# Altium PCB MainPCB.PcbDoc (part 2 of 3)
Units mil, origin at the board's own origin, x right, y up, seen from the top; angles counter-clockwise.
Board outline 2751.85 x 1031.01 mil, 4 copper layers (L1, L2, L3, L4), stack 61.583 mil thick; 64 components, 73 nets, 299 pads, 162 vias.
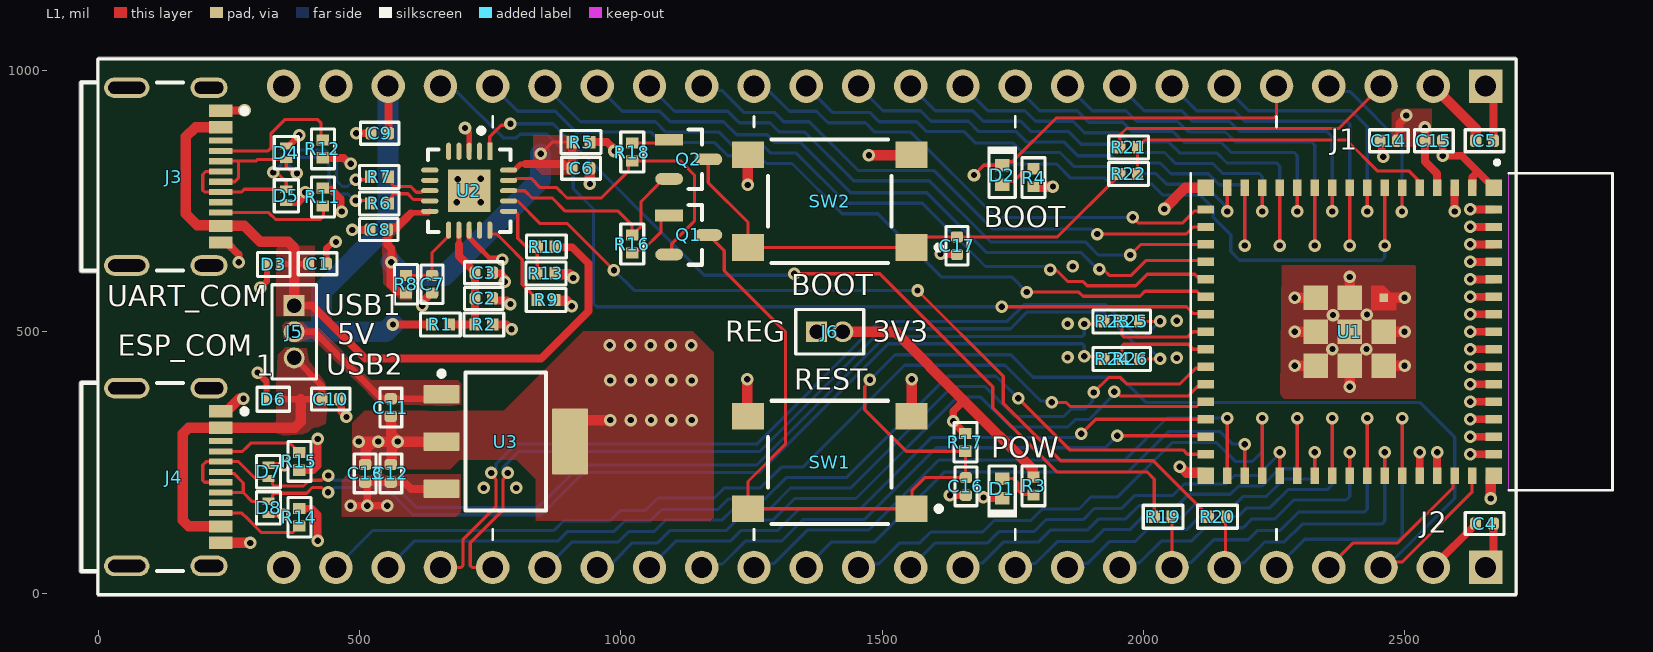
[diagram p0: L1 view]

## Part data (continued)
U3: "IC REG LINEAR 3.3V 1.5A SOT223-4", Case/Package=SOP, Dropout Voltage1-Max=550mV, Dropout Voltage1-Nom=340mV, Input Voltage Absolute-Max=20V, LCSC Part Number=C181262, Manufacturer="Texas Instruments", Min Input Voltage=3.8V, Operating Temperature, TJ-Max=125°C, Operating Temperature, TJ-Min=-40°C, Output Current1-Max=1.5A, Output Voltage1-Max=3.4V, Output Voltage1-Min=3.2V, Output Voltage1-Nom=3.3V, Package Body Material=Plastic, Package Shape=Rectangular, Package Style="SMALL OUTLINEMeter", Peak Reflow Temperature (Cel)=260°C, Supplier Part Number=296-24897-1-ND, Voltage Tolerance-Max=3%, Adjustability=FIXED, Category="Voltage Regulators - Linear", Channels=1, ComponentLink1Description=https://www.ti.com:443/lit/ds/symlink/tl1963a.pdf?src-supplier=IHS+Markit, ComponentLink1URL=https://www.ti.com:443/lit/ds/symlink/tl1963a.pdf?src-supplier=IHS+Markit, ComponentLink2Description=https://datasheet.ciiva.com/2046/-2046068.pdf?src-supplier=Digikey, ComponentLink2URL=https://datasheet.ciiva.com/2046/-2046068.pdf?src-supplier=Digikey, Height - Seated (Max)=1.8mm, JESD-30 Code=R-PDSO-G4, JESD-609 Code=e3, Length=6.5mm, Line Regulation-Max=0.01%, Load Regulation-Max=0.07%, Manufacturer Part Number=TL1963A-33DCYR, Max Supply Voltage=20V, Moisture Sensitivity Level=2, Number of Outputs=1, Packaging="Tape and Reel", Pins=4, Pricing="1=2.91, 10=2.614, 25=2.4712, 100=2.1417, 250=2.03188, 500=1.8232, 1000=1.53764 (USD)", Qualification Status="Not Qualified", Reach SVHC Compliant=Yes, Regulator Type="FIXED POSITIVE SINGLE OUTPUT LDO REGULATOR", RoHS=Yes, RoHS Compliant=Yes, Stock=4105, Supplier=Digikey, Surface Mount=Yes, Technology=BIPOLAR, Terminal Finish=Tin, Terminal Form="Gull Wing", Terminal Pitch=2.3mm, Terminal Position=DUAL, Width=3.5mm

## Via types
v1: diameter 24, hole 12, L1 to L4, tented both sides, 162 vias

## Nets (pads, with @x,y where several pads share a name; then routed paths per layer and width w, separated by ;. In a path a pad name is that pad's centre, name@x,y a point inside that pad or via, vN(x,y) a via of type N, cw(c..) or ccw(c..) an arc to the next point about the centre after c; other vN are vias at no path point)
+3V3: C4.2 C5.2 C14.2 C15.2 J1.2 J2.1 J6.2 R2.1 R3.2 R4.2 R5.1 R17.2 U1.3 | length 4585.8
  L1 w15: R2.1@755.01,514 782,514 v1(791,505) ; R5.1@941.01,863 974,863 986.28,850.72 986.28,847.72 v1(988,846) ; 1656.59,368.41 1636.17,347.98 1636.17,327.67 1658.32,305.52 R17.2@1659.5,305.52 ; C14.2@2486.89,865.55 2490.02,868.68 2490.02,898.59 2503,911.56 v1(2503,914) ; v1(2539,891) 2539,826 2561.98,803.02 2561.98,775.96 U1.3@2562.35,775.59 ; J2.1@2655,49 2669.93,63.93 C4.2@2669.93,133
  L1 w20: J6.2@1425,500 1525,500 1656.59,368.41 1788.19,236.81 1788.19,222.64 1788.82,222.01 R3.2@1790,222.01 ; R4.2@1790,777.99 v1(1827,778) ; J1.2@2555,970 2636.1,888.9 C5.2@2636.1,865.55
  L2 w15: v1(2503,914) 2505.44,914 2526.71,892.72 2537.28,892.72 v1(2539,891)
  L2 w20: 2489,778 2658.28,778 2670,766.28 2670,244 2629.28,203.28 2629.28,154.72 2655,129 J2.1@2655,49
  L2 w40: v1(791,505) 812,505 846,539 846,773 919,846 v1(988,846) 1115,719 1441.5,719 ; J6.2@1425,500 1441.5,516.5 1441.5,719 ; J1.2@2555,970 2555,907 v1(2539,891) 2524,876 2524,813 2489,778 v1(1827,778) 1768,719 1441.5,719
  other v1: 1636.17,328.83
+3V3_FTDI: C6.2 C8.2 R5.2 R8.1 U2.10 U2.20 | length 912.7
  L1 w6: v1(846.75,840.75) 869,863 R5.2@906.99,863
  L1 w10.01: 598,726.43 599.48,727.9 631.86,727.9 U2.10@634.59,730.63 ; U2.20@785.41,809.37 796.71,809.37 808.34,821 818,821
  L1 w15: R8.1@589,573.99 585.87,577.12 572.7,577.12 559.69,590.13 559.69,632.19 v1(560.73,633.24) 560.73,659.3 553.93,666.1 553.93,696.74 557.06,699.87 571.44,699.87 598,726.43 ; 818,821 829.81,821 890.17,821 893.85,817.31 903.94,817.31 907.07,814.18 C6.2@907.07,813 907.03,813.04 R5.2@906.99,863 R5.2@906.99,863
  L4 w40: v1(560.73,633.24) 561,632.97 561,632 585,608 663,608 846.75,791.75 v1(846.75,840.75)
+3V3_REG: C12.2 C13.2 J6.1 U3.3 | length 1330.5
  L1 w15: v1(483,167) v1(515,167) ; C13.2@511,212.07 585.93,212.07 598.55,199.45 U3.3@656.97,199.45 ; C13.2@511.87,212.07 515,208.94 v1(515,167) ; v1(553,167) v1(515,167)
  L2 w40: v1(483,167) v1(515,167) ; v1(553,167) 597.28,167 600.28,170 644.56,170 ; 1375,424 J6.1@1375,500
  L2 w60: 644.56,170 676.56,138 1089,138 1375,424
+5V: C9.2 C11.2 J1.22 J5.2 R1.1 U3.1 | length 1220.8
  L1 w12: J5.2@375,500 414,500 540.74,373.26 558.67,373.26 C11.2@560,371.93 648.35,371.93 U3.1@656.97,380.55
  L1 w15: J1.22@555,970 555.47,969.53 555.47,880.47 C9.2@555.93,880 ; v1(564,514) R1.1@637.99,514
  L4 w40: J5.2@375,500 427,500 ; J1.22@555,970 555,704.6 427,576.6 427,500 ; v1(564,514) 550,500 427,500
+5V_VBUS1: C1.2 D3.2 J3.A4B9 J3.B4A9 J5.1 R10.2 | length 1432.3
  L1 w12: D3.2@348.54,629 349.16,629.62 375.68,629.62 402.2,629.62 C1.2@402.82,630.23
  L1 w15: J5.1@375,550 410,550 511,449 847.72,449 938.5,539.78 938.5,630.5 907.3,661.7 R10.2@874.75,661.7
  L1 w20: J3.A4B9@234.84,891.49 186.49,891.49 168,873 168,725.72 189.39,704.32 233.03,704.32 J3.B4A9@234.84,702.51 279.49,702.51 310,672 363.97,672 375.68,660.28 375.68,629.62 375,628.93 J5.1@375,550
+5V_VBUS2: C10.2 D6.2 J4.A4B9 J4.B4A9 J5.3 | length 703
  L1 w12: D6.2@347.71,371 387.89,371 C10.2@428.07,371 428.07,396.93 J5.3@375,450
  L1 w20: J4.B4A9@234.84,127.51 173.72,127.51 162,139.23 162,304.77 173.72,316.49 J4.A4B9@234.84,316.49 376.18,316.49 387.89,328.2 387.89,371
+VCC_FTDI: C2.2 C3.2 R1.2 R2.2 U2.12 | length 242.3
  L1 w10.1: 690.32,667.32 U2.12@690.32,694.59
  L1 w15: R1.2@672.01,514 R2.2@720.99,514 R2.2@720.99,514 721.03,563.96 C2.2@721.07,564 C3.2@721.07,613 721.07,614.18 690.32,644.94 690.32,667.32
BTN_GPIO0: C17.2 Q2.3 R22.1 SW2.1 SW2.2 | length 970.5
  L1 w6: Q2.3@1167.56,830 1167.56,785.44 1243.5,709.5 SW2.2@1243.5,661.42 SW2.1@1556.5,661.42 1576.7,681.62 C17.2@1643.5,681.62 1835.79,681.62 1954.99,800.82 R22.1@1954.99,802
CHIP_PU: C16.2 J2.3 Q1.3 R17.1 SW1.1 SW1.2 U1.45 | length 3195.8
  L1 w6: Q1.3@1167.56,685.29 1197.99,654.86 1197.99,617.01 1315,500 1315,285 1243.5,213.5 SW1.2@1243.5,161.42 SW1.1@1556.5,161.42 1557.15,162.07 1557.15,196.15 1581.98,220.98 C16.2@1660.5,220.98 1660,221.48 1660,271 R17.1@1659.5,271.5 1546.26,271.5 1467,350.76 1467,395.23 1476.91,405.14 v1(1476.91,408.09) ; J2.3@2455,49 2465.33,59.33 2494.95,59.33 2629.28,193.66 U1.45@2629.28,224.41
  L4 w6: v1(1476.91,408.09) 1524.82,456 1746,456 1789,413 1957,413 2005,365 2529,365 2596,298 2596,181.15 2463.85,49 J2.3@2455,49
CON1_USB_N: D4.2 J3.A7 J3.B7 R6.1 | length 484.2
  L1 w6.03: J3.A7@234.84,787.16 261.47,787.16 268.38,794.07 268.38,826.53 ; J3.B7@234.84,826.53 268.38,826.53 ; v1(380.34,803.65) 376.9,807.09 368.91,807.09 360,816 D4.2@360,830 305.39,830 301.92,826.53 268.38,826.53 ; v1(493,751.12) 515.44,751.12 R6.1@520.99,745.56
  L4 w6.03: v1(380.34,803.65) 380.34,804.32 364.69,819.98 364.69,830.47 368.22,834 428,834 442,820 442,783.19 461.22,763.97 477,763.97 489.85,751.12 v1(493,751.12)
CON1_USB_P: D5.2 J3.A6 J3.B6 R7.1 | length 549.1
  L1 w6.03: J3.A6@234.84,806.84 205.84,806.84 200,801 200,771 203.53,767.47 J3.B6@234.84,767.47 274.47,767.47 279.8,772.8 D5.2@360,772.8 360,786.8 344.88,801.91 338.09,801.91 v1(335,805) ; v1(493,791) 515.44,791 R7.1@520.99,796.56
  L4 w6.03: v1(335,805) 335.68,805 350.66,819.98 350.66,836.28 362.41,848.03 433.81,848.03 456.03,825.81 456.03,789 467.03,778 477,778 490,791 v1(493,791)
CON2_USB_N: D7.2 J4.A7 J4.B7 R23.1 | length 2009.5
  L1 w6.03: J4.A7@234.84,212.16 203.53,212.16 200,215.69 200,245 206.53,251.53 J4.B7@234.84,251.53 268.47,251.53 300.8,219.2 D7.2@326,219.2 329.66,219.2 333.53,215.33 333.53,208.53 337.06,205 393.03,205 404,215.97 427.53,215.97 436.52,224.96 v1(440.05,224.96) ; v1(1887,515) 1919.98,515 R23.1@1924.98,520
  L4 w6.03: v1(440.05,224.96) 443.56,224.96 452.57,215.95 556.44,215.95 608.36,164.03 842.5,164.03 923.47,245 1260.16,245 1506.17,491.01 1883.47,491.01 1887,494.55 v1(1887,515)
CON2_USB_P: D8.2 J4.A6 J4.B6 R24.1 | length 1971.2
  L1 w6.03: J4.B6@234.84,192.47 277.53,192.47 ; J4.A6@234.84,231.84 237.73,228.95 259.34,228.95 277.53,210.76 277.53,192.47 ; v1(440,192.96) 436.47,192.96 427.48,201.94 409.81,201.94 398.84,190.97 337.32,190.97 333.79,187.44 333.79,179.67 329.92,175.8 D8.2@326,175.8 325.2,175 295,175 277.53,192.47 ; v1(1887,453) 1919.98,453 R24.1@1924.98,448
  L4 w6.03: v1(440,192.96) 443.55,192.96 452.52,201.92 550.63,201.92 602.55,150 848.31,150 929.28,230.97 1265.97,230.97 1511.99,476.99 1883.47,476.99 1887,473.45 v1(1887,453)
CON_ESP_USB_N: J2.21 R25.1 | length 1750
  L1 w6.03: J2.21@655,49 694.45,49 697.99,52.53 697.99,102.04 760.97,165.02 760.97,217.48 751.99,226.47 v1(751.99,230) ; R25.1@1993.01,520 v1(2032,520)
  L4 w6.03: v1(751.99,230) 755.97,230 760.97,235 760.97,246.78 799.19,285 1260.16,285 1495.16,520 1740,520 1772.05,552.05 1927.95,552.05 1990.97,489.03 2001.03,489.03 v1(2032,520)
CON_ESP_USB_P: J2.20 R26.1 | length 1725.1
  L1 w6.03: J2.20@755,49 715.55,49 712.01,52.53 712.01,96.23 775,159.21 775,217.48 783.99,226.47 v1(783.99,230) ; R26.1@1993.01,448 v1(2032,448)
  L4 w6.03: v1(783.99,230) 780,230 775,235 775,240.97 805,270.97 1265.97,270.97 1500.97,505.97 1745.81,505.97 1777.86,538.01 1922.14,538.01 1985.16,475 2005,475 v1(2032,448)
CON_GPIO0: J1.3 R21.1 | length 562.1
  L1 w6: R21.1@1954.99,853 1954.99,876.2 1967.8,889 2374,889 J1.3@2455,970
DTR_FTDI: Q2.2 R16.1 U2.18 | length 426.4
  L1 w6: U2.18@785.41,770 816.28,770 818,768.28 830.28,756 869,756 894,731 995,731 1021.22,704.78 1021.22,685.79 R16.1@1022,685.01 ; R16.1@1023.18,685.01 1028.81,690.64 1028.81,691.82 1039,702.01 1039,749.4 1071.16,781.56 1071.16,783.11 1080.65,792.6 Q2.2@1092.71,792.6
ESP_USB_N: R23.2 R25.2 U1.23 | length 192.1
  L1 w6.03: R23.2@1958.99,520 1958.99,493.82 1962.52,490.28 2085.28,490.28 2095,500 U1.23@2119.44,500
ESP_USB_P: R24.2 R26.2 U1.24 | length 190.7
  L1 w6.03: R24.2@1958.99,448 1958.99,472.72 1962.52,476.25 2086,476.25 2095.72,466.54 U1.24@2119.44,466.54